# Altium PCB ovencontrol.PcbDoc
Units mil, origin at the board's own origin, x right, y up, seen from the top; angles counter-clockwise.
Board outline 3940 x 3940 mil, 2 copper layers (Top Layer, Bottom Layer); 74 components, 54 nets, 274 pads, 54 vias.
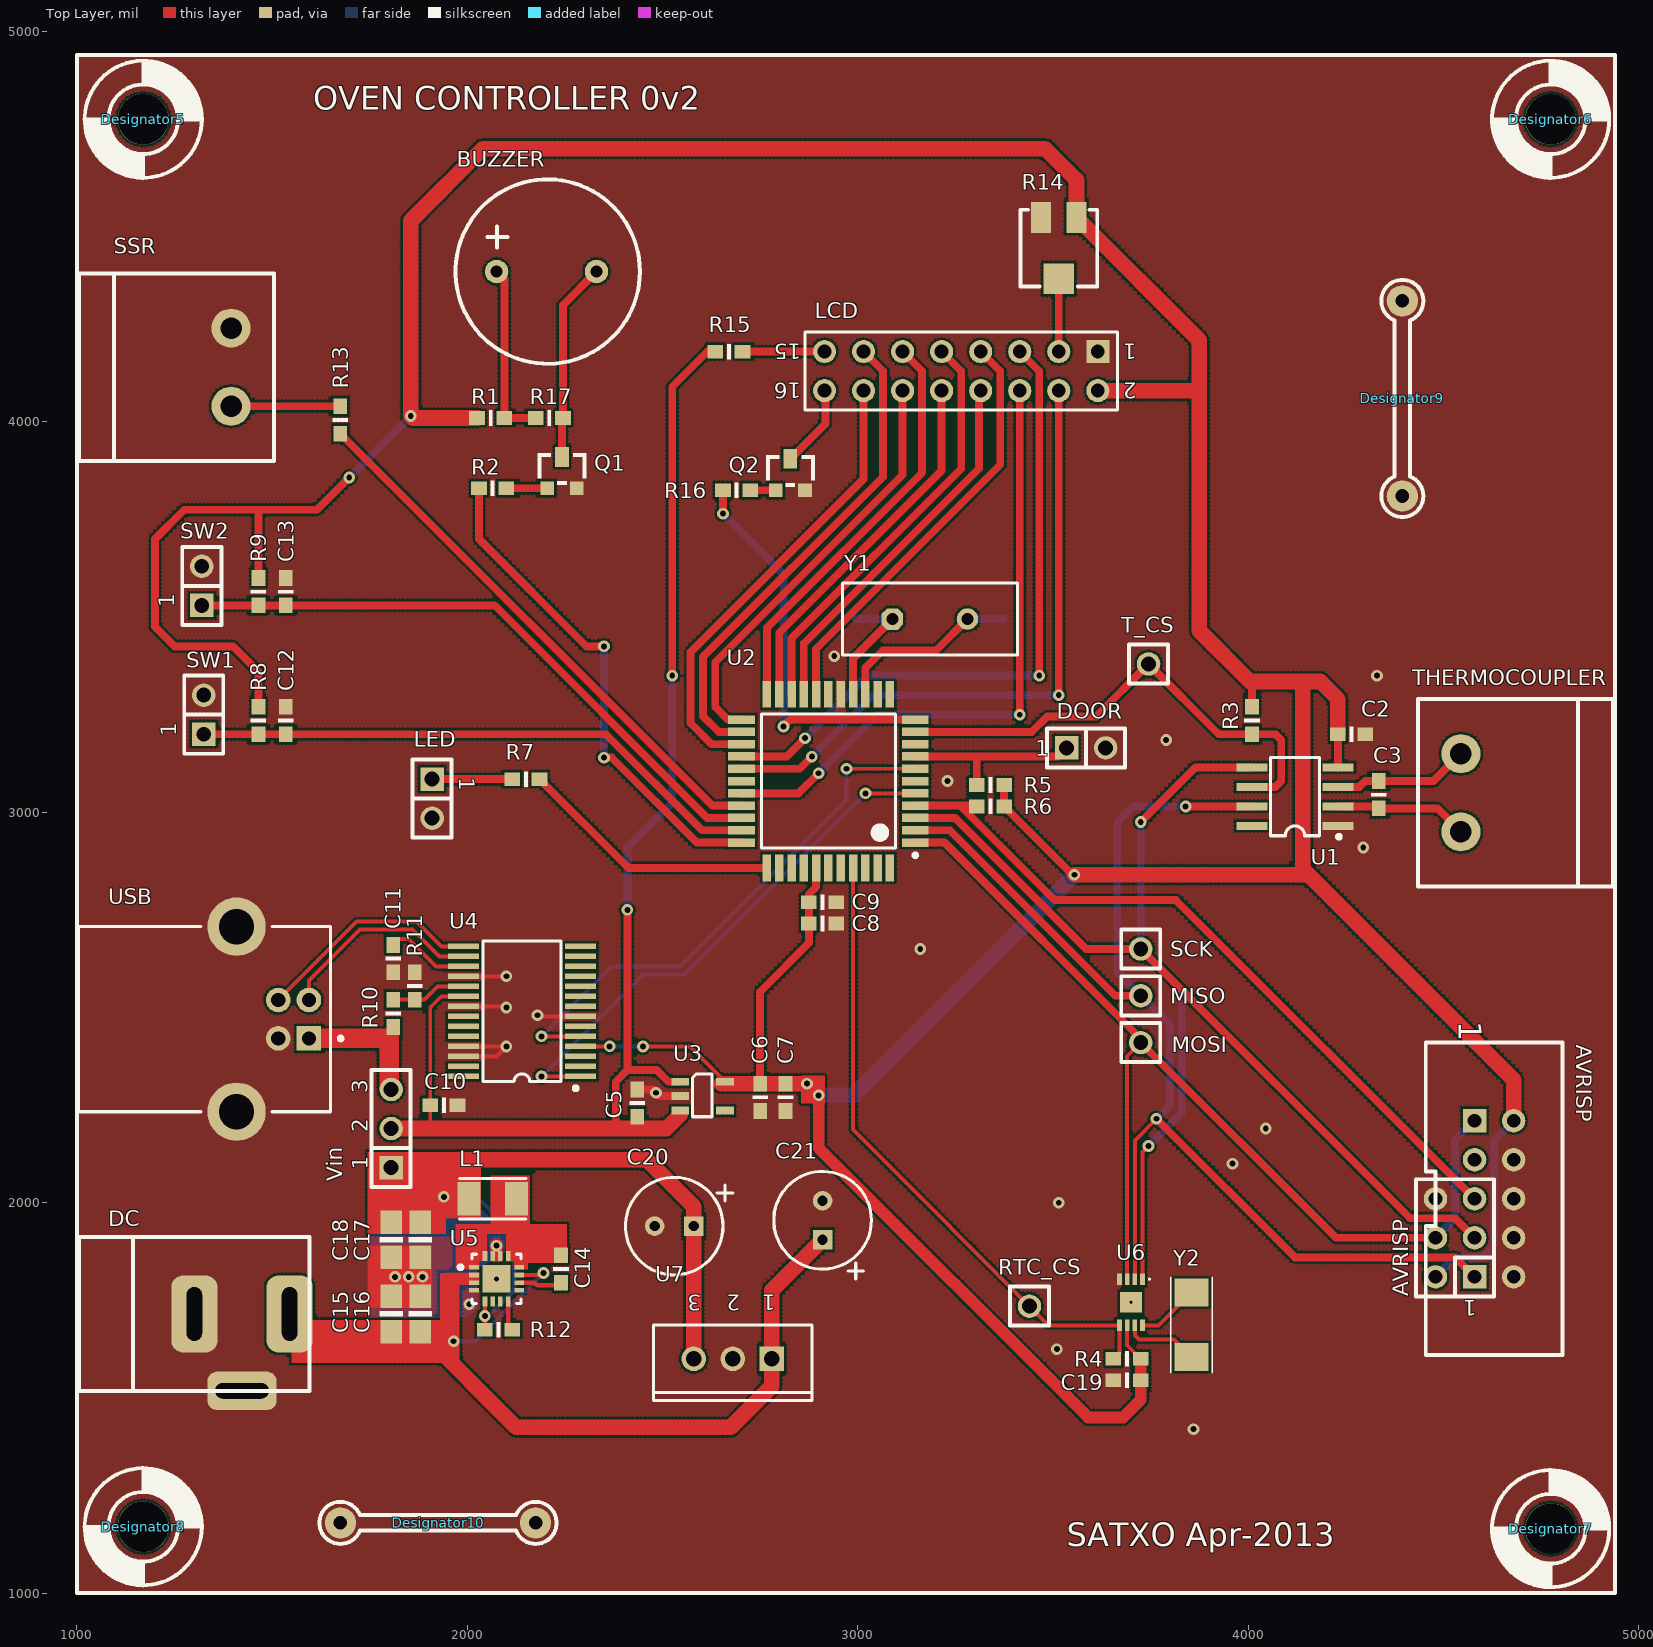
[diagram p0: Top Layer view]
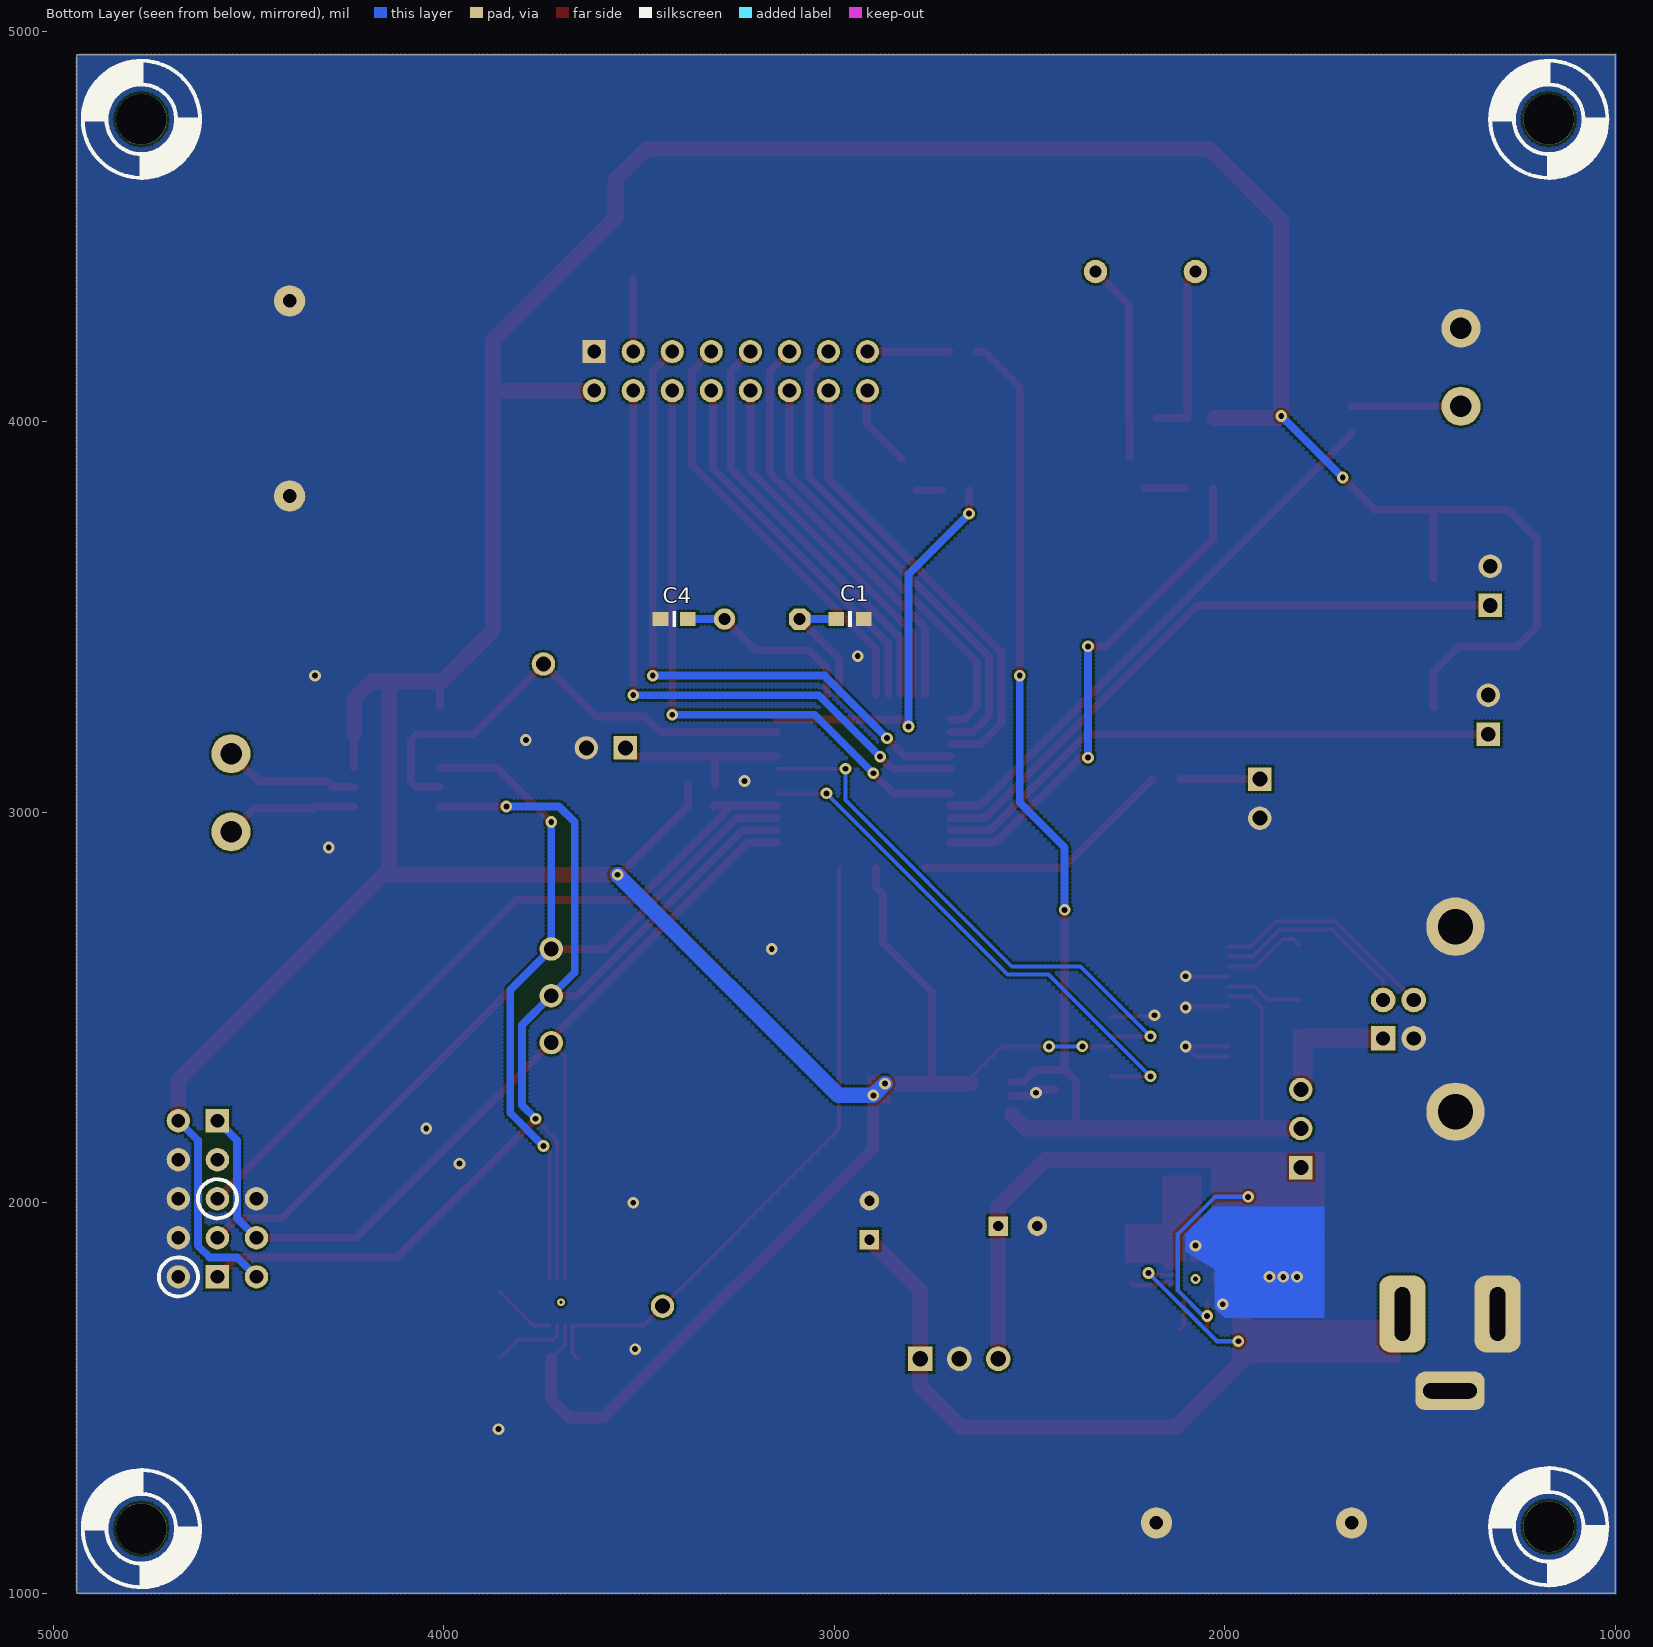
[diagram p1: Bottom Layer view, seen from below]

## Layer stack, top to bottom
Top Layer: signal copper 1.4
Dielectric: dielectric 12.6, FR-4, Dk 4.8
Bottom Layer: signal copper 1.4

## Board outline
1000,1000 4940,1000 4940,4940 1000,4940

## Design rules (kind name [scope] priority, off if disabled: settings)
Clearance Clearance-xPP-xTP-xTT [All] p1: gap=5.91
ComponentClearance [All] p1: gap=9.84 collisioncheckmode=3 verticalgap=9.84 showdistances=FALSE
DiffPairsRouting [All] p1: maxlimit=9.84 minlimit=9.84 mostfreqgap=9.84 maxuncoupledlength=492.13
Height [All] p1: minheight=0 maxheight=984.25 prefheight=492.13
HoleSize HoleSize-PTH [All] p1: absolutevalues=TRUE maxlimit=78.74 minlimit=9.84 maxpercent=80.000 minpercent=20.000
HoleToHoleClearance [All] p1: gap=5.91 allowstackedmicrovias=TRUE
MinimumAnnularRing "Minimum IAR  >0.45mm" [((ObjectKind = 'Pad') OR (ObjectKind = 'Via')) And (Layer = 'MultiLayer') And (HoleDiameter > AsMM(0.45))] p1: minimumring=9.84 // minimum inner annular ring for pads > 0.45mm finished hole size
MinimumAnnularRing "Minimum IAR <=0.45mm" [((ObjectKind = 'Pad') OR (ObjectKind = 'Via')) And (Layer = 'MultiLayer') And (HoleDiameter <= AsMM(0.45))] p2: minimumring=8.86 // minimum inner annular ring for pads <= 0.45mm finished hole size
MinimumSolderMaskSliver [All] p1: minsoldermaskwidth=3.94
PlaneClearance PlaneClearance-IPI [All] p1: clearance=15.75
PlaneConnect [All] p1: planeconnectstyle=Direct reliefexpansion=15.75 reliefentries=4 reliefconductorwidth=7.87 reliefairgap=7.87
PolygonConnect PolygonConnect-xTW [All] p1: connectstyle=Direct reliefconductorwidth=7.87 reliefentries=4 polygonreliefangle="90 Angle"
RoutingCorners [All] p1: cornerstyle=45-Degree minsetback=98.43 maxsetback=98.43
RoutingVias "RoutingVias > 0.45mm" [(ObjectKind = 'Via') And (HoleDiameter > AsMM(0.45))] p1: holewidth=19.68 width=39.37 viastyle="Through Hole" minholewidth=17.72 minwidth=37.4 maxholewidth=35.43 maxwidth=55.12 // finishet hole size > 0.45mm
RoutingVias "RoutingVias <= 0.45mm" [(ObjectKind = 'Via') And (HoleDiameter <= AsMM(0.45))] p2: holewidth=11.81 width=31.5 viastyle="Through Hole" minholewidth=9.84 minwidth=27.56 maxholewidth=19.68 maxwidth=39.37 // finishet hole size <= 0.45mm
SilkToSilkClearance [All] p1: silktosilkclearance=7.87
SilkscreenOverComponentPads [All] p1: minsilkscreentomaskgap=7.87
SolderMaskExpansion [All] p1: expansion=3.94
Width Width-xTW [All] p1: maxlimit=59.06 minlimit=5.91 preferedwidth=7.87
17 further rules are at their usual default settings.

## Classes and differential pairs
component class ovencontrol: AVRISP BUZZER C1 C2 C3 C4 C5 C6 C7 C8 C9 C10 C11 C12 C13 C14 C15 C16 C17 C18 C19 C20 C21 DC DOOR L1 LCD LED MISO MOSI Q1 Q2 R1 R2 R3 R4 R5 R6 R7 R8 R9 R10 R11 R12 R13 R14 R15 R16 R17 RTC_CS SCK SSR SW1 SW2 T_CS THERMOCOUPLER U1 U2 U3 U4 U5 U6 U7 USB Vin Y1 Y2

## Components (designator, comment, footprint, x,y, rotation, side; value= is the part's Value field where it differs from the comment)
AVRISP "ICSP" DIL-6 4580,1810 r180 top (schematic designator JP1)
AVRISP "ICSP" IDC-10 4580,2210 r270 top (schematic designator CON3)
BUZZER "BUZZER" Buzzer_12mm 2075,4385 r0 top (schematic designator BZ1)
C1 "22pF" 0603 2925,3495 r0 bottom
C2 "100nF" 0603 4230,3200 r0 top
C3 "100nF" 0603 4335,3010 r90 top
C4 "22pF" 0603 3445,3495 r180 bottom
C5 "1uF" 0603 2435,2220 r90 top
C6 "1uF" 0603 2750,2305 r270 top
C7 "100nF" 0603 2815,2305 r270 top
C8 "100nF" 0603 2945,2715 r180 top
C9 "1nF" 0603 2945,2770 r180 top
C10 "100nF" 0603 1905,2250 r0 top
C11 "100nF" 0603 1810,2590 r90 top
C12 "100nF" 0603 1535,3200 r90 top
C13 "100nF" 0603 1535,3530 r90 top
C14 "22nF" 0603 2240,1795 r90 top
C15 "10uF" 0805 1805,1670 r90 top
C16 "10uF" 0805 1880,1670 r90 top
C17 "22uF" 0805 1880,1950 r270 top
C18 "22uF" 0805 1805,1950 r270 top
C19 "100nF" 0603 3725,1545 r180 top
C20 "100uF" RADIAL-2.5MM 2580,1940 r180 top
C21 "10uF" RADIAL-2.5MM 2910,1905 r90 top
DC "3P" JACKPOW/PD-2.5MM-TH 1545,1715 r180 top (schematic designator CON4)
Designator5 "Comment" NPTH-3MM 1170,4775 r0 top
Designator6 "Comment" NPTH-3MM 4775,4775 r0 top
Designator7 "Comment" NPTH-3MM 4775,1165 r0 top
Designator8 "Comment" NPTH-3MM 1170,1170 r0 top
Designator9 "Comment" TEST-PROBE2 4395,3810 r90 top
Designator10 "Comment" TEST-PROBE2 2175,1180 r180 top
DOOR "DOOR" SIP-2 3535,3165 r0 top (schematic designator CON9)
L1 "4.7uH" 1210 2065,2010 r180 top
LCD "CON16" HDR2X8 3615,4180 r180 top (schematic designator P1)
LED "LED" SIP-2 1910,3085 r270 top (schematic designator CON6)
MISO "Test Point" TERMINAL 3725,2530 r0 top (schematic designator TP1)
MOSI "Test Point" TERMINAL 3725,2410 r0 top (schematic designator TP2)
Q1 "BC847C" SOT-23@BEC 2205,3830 r0 top
Q2 "BC847C" SOT-23@BEC 2790,3825 r0 top
R1 "100R" 0603 2095,4010 r180 top
R2 "10K" 0603 2100,3830 r180 top
R3 "10K" 0603 4010,3270 r270 top
R4 "10K" 0603 3725,1600 r180 top
R5 "10K" 0603 3375,3070 r180 top
R6 "10K" 0603 3375,3015 r180 top
R7 "470K" 0603 2185,3085 r180 top
R8 "10K" 0603 1465,3270 r270 top
R9 "10K" 0603 1465,3600 r270 top
R10 "4.7K" 0603 1810,2450 r90 top
R11 "10K" 0603 1865,2520 r90 top
R12 "10K" 0603 2115,1675 r180 top
R13 "100R" 0603 1675,3970 r90 top
R14 "10K" POT4MM-2 3515,4445 r270 top
R15 "100R" 0603 2635,4180 r0 top
R16 "10K" 0603 2655,3825 r0 top
R17 "1K" 0603 2245,4010 r180 top
RTC_CS "Test Point" TERMINAL 3440,1735 r0 top (schematic designator TP5)
SCK "Test Point" TERMINAL 3725,2650 r0 top (schematic designator TP3)
SSR "SSR" INTERLOCK2-5MM 1395,4040 r90 top (schematic designator CON5)
SW1 "SW1" SIP-2 1325,3200 r90 top (schematic designator CON7)
SW2 "SW2" SIP-2 1320,3530 r90 top (schematic designator CON8)
T_CS "Test Point" TERMINAL 3745,3380 r0 top (schematic designator TP4)
THERMOCOUPLER "2P" INTERLOCK2-5MM 4545,3150 r270 top (schematic designator CON1)
U1 "MAX31855" SOIC-8 4120,3040 r180 top
U2 "ATmega8515L-8AU" TQFP-44 2925,3080 r180 top
U3 "MCP1824T" SOT-23-5 2545,2310 r0 top
U4 "FT232RL" SSOP-28 2140,2490 r180 top
U5 "MCP16321/2" QFN50P300X300-16V4L 2075,1805 r0 top
U6 "DS1347" TDFN-8 3700,1745 r270 top
U7 "7805" TO-220 2680,1600 r180 top
USB "440119-4" 440119 1555,2470 r180 top (schematic designator J1)
Vin "3P" SIP-3 1805,2090 r90 top (schematic designator JP2)
Y1 "8MHz" HC-49U 3185,3495 r0 top
Y2 "32.768MHz" XTAL-SMD-4.9x1.8 3855,1770 r270 top

## Footprints (in the part's own frame and the unit in brackets; to place one, negate y for a bottom-side part, rotate by r counter-clockwise, add the part's x,y. Pads: shape width x height; smd on the part's side, far side on the other; paste and mask are expansions set on the pad)
0603 [mil]
  rect 40x35 smd: 1(0,0) 2(70,0)
  silkscreen extent 30,-20 40,20
0805 [mil]
  rect 60x55 smd: 1(0,0) 2(90,0)
  silkscreen extent 38,-30 52,30
1210 [mm] "2-pin 1210 outline"
  rect 1.5x2.2 smd: 1(-1.55,0) 2(1.55,0)
  silkscreen extent -2.16,-1.32 2.16,1.32
440119 [mm] "Connector; USB1.1, Type B, Thru-Hole; 4 Position; Right Angle"
  rect 1.6x1.6 hole 0.92: 1(-1,1.25)
  round 1.6 hole 0.92: 2(-1,-1.25) 3(1,-1.25) 4(1,1.25)
  round 3.8 hole 2.3: 5(3.71,6.02) 6(3.71,-6.02)
  silkscreen extent -3.18,-6.02 13.99,6.02
Buzzer_12mm [mil] "12mm dia; holes 6.5mm"
  round 60 hole 30: +(0,0) -(255.91,0)
  silkscreen extent -105,-236 367,236
DIL-6 [mil] "Dual inline 2x3 pins 2.54mm pitch"
  rect 60x60 hole 35: 1(0,0)
  round 60 hole 35: 2(100,0) 3(0,-100) 4(100,-100) 5(0,-200) 6(100,-200)
  silkscreen extent -50,-250 150,50
HC-49U [mm] "Quartz Crystal, Thru-Hole; 2 Leads; Body 11.35 x 4.65 x 13.46 mm (LxWxH max)"
  oct 1.4x1.4 hole 0.8: 1(-2.44,0)
  round 1.4 hole 0.8: 2(2.44,0)
  silkscreen extent -5.7,-2.35 5.7,2.35
HDR2X8 [mm] "Connector; Header; 8x2 Position"
  rect 1.5x1.5 hole 0.9: 1(0,0)
  round 1.5 hole 0.9: 2(0,2.54) 3(2.54,0) 4(2.54,2.54) 5(5.08,0) 6(5.08,2.54) 7(7.62,0) 8(7.62,2.54) 9(10.16,0) 10(10.16,2.54) 11(12.7,0) 12(12.7,2.54) 13(15.24,0) 14(15.24,2.54) 15(17.78,0) 16(17.78,2.54)
  silkscreen extent -1.27,-1.27 19.05,3.81
IDC-10 [mil]
  rect 60x60 hole 35: 1(0,0)
  round 60 hole 35: 2(0,100) 3(100,0) 4(100,100) 5(200,0) 6(200,100) 7(300,0) 8(300,100) 9(400,0) 10(400,100)
  silkscreen extent -200,-125 600,225
INTERLOCK2-5MM [mil]
  round 100 hole 55: 1(0,0) 2(200,0)
  silkscreen extent -140,-110 340,390
JACKPOW/PD-2.5MM-TH [mm] "Jack Power 2.5mm with insertion detect - Through Hole"
  rrect50% 3x5 hole 1 slot 3.5 at 90 deg: 1(0,0) 2(6.2,0)
  rrect50% 4.5x2.5 hole 1 slot 3.5 at 0 deg: 3(3.1,5)
  silkscreen extent -1.3,-5 13.7,5
NPTH-3MM [mil]
  round 130 hole 130 unplated: 1(0,0)
  silkscreen extent -150,-150 150,150
POT4MM-2 [mm] "Square Trimming Potentiometer"
  rect 2x1.3 smd: CCW(-2,-1.15) CW(-2,1.15)
  rect 2x2 smd: W(2,0)
  silkscreen extent -2.5,-2.5 2.5,2.5
QFN50P300X300-16V4L [mm] "QFN, 16-Leads, Body 3x3mm, Pitch 0.5mm, IPC High Density"
  rect 0.65x0.3 smd: 1(-1.475,0.75) 2(-1.475,0.25) 3(-1.475,-0.25) 4(-1.475,-0.75) 9(1.475,-0.75) 10(1.475,-0.25) 11(1.475,0.25) 12(1.475,0.75)
  rect 0.3x0.65 smd: 5(-0.75,-1.475) 6(-0.25,-1.475) 7(0.25,-1.475) 8(0.75,-1.475) 13(0.75,1.475) 14(0.25,1.475) 15(-0.25,1.475) 16(-0.75,1.475)
  rect 1.8x1.8 smd: 17(0,0)
  silkscreen extent -2.47,-1.6 1.6,1.6, body extent -1.58,-1.58 1.58,1.58, height 1
RADIAL-2.5MM [mil]
  rect 50x50 hole 26: 1(0,0)
  round 50 hole 26: 2(100,0)
  silkscreen extent -100,-125 175,125
SIP-2 [mil]
  rect 60x60 hole 38: 1(0,0)
  round 60 hole 38: 2(100,0)
  silkscreen extent -50,-50 150,50
SIP-3 [mil]
  rect 60x60 hole 38: 1(0,0)
  round 60 hole 38: 2(100,0) 3(200,0)
  silkscreen extent -50,-50 250,50
SOIC-8 [mil] "Small Outline 8 leads Body Size 150mils"
  rect 80x20 smd: 1(-110,75) 2(-110,25) 3(-110,-25) 4(-110,-75) 5(110,-75) 6(110,-25) 7(110,25) 8(110,75)
  silkscreen extent -117,-100 63,107
SOT-23-5 [mil]
  rect 45x20 smd: 1(0,0) 2(0,-37) 3(0,-74) 4(115,-74) 5(115,0)
  silkscreen extent 32,-90 82,20
SOT-23@BEC [mil] "Bipolar Transistor SOT23"
  rect 35x35 smd: B(0,0) E(75,0)
  rect 35x50 smd: C(37.5,80)
  silkscreen extent -25,8 100,90
SSOP-28 [mil]
  rect 80x13.78 smd: 1(-150,166.4) 2(-150,140.8) 3(-150,115.2) 4(-150,89.6) 5(-150,64) 6(-150,38.4) 7(-150,12.8) 8(-150,-12.8) 9(-150,-38.4) 10(-150,-64) 11(-150,-89.6) 12(-150,-115.2) 13(-150,-140.8) 14(-150,-166.4) 15(150,-166.4) 16(150,-140.8) 17(150,-115.2) 18(150,-89.6) 19(150,-64) 20(150,-38.4) 21(150,-12.8) 22(150,12.8) 23(150,38.4) 24(150,64) 25(150,89.6) 26(150,115.2) 27(150,140.8) 28(150,166.4)
  silkscreen extent -143,-180 100,202
TDFN-8 [mm] "SON, 8-Leads, Body 2x3mm, Pitch 0.5mm, Microchip Recommended"
  rect 0.75x0.3 smd: 1(-1.5,0.75) 2(-1.5,0.25) 3(-1.5,-0.25) 4(-1.5,-0.75) 5(1.5,-0.75) 6(1.5,-0.25) 7(1.5,0.25) 8(1.5,0.75)
  rect 1.36x1.46 smd: 9(0,0)
  silkscreen extent -1.55,1.15 -1.45,1.25, body extent -1.52,-1.02 1.52,1.02, height 0.8
TERMINAL [mil]
  round 60 hole 37.99: 1(0,0)
  silkscreen extent -50,-50 50,50
TEST-PROBE2 [mil]
  round 80 hole 35: 1(0,0) 1(500,0)
  silkscreen extent -54,-54 554,54
TO-220 [mm] "TO, Thru-Hole, Vertical, Heatsink Mounted; 3 In-Line Leads; Pitch 2.54 mm"
  rect 1.6x1.6 hole 1: 1(-2.54,0)
  round 1.6 hole 1: 2(0,0) 3(2.54,0)
  silkscreen extent -5.15,-2.2 5.15,2.7
TQFP-44 [mm] "Thin QFP, 44-Leads, Body 10x10mm, Pitch 0.8mm, IPC Medium Density"
  rect 1.75x0.55 smd: 1(-5.65,4) 2(-5.65,3.2) 3(-5.65,2.4) 4(-5.65,1.6) 5(-5.65,0.8) 6(-5.65,0) 7(-5.65,-0.8) 8(-5.65,-1.6) 9(-5.65,-2.4) 10(-5.65,-3.2) 11(-5.65,-4) 23(5.65,-4) 24(5.65,-3.2) 25(5.65,-2.4) 26(5.65,-1.6) 27(5.65,-0.8) 28(5.65,0) 29(5.65,0.8) 30(5.65,1.6) 31(5.65,2.4) 32(5.65,3.2) 33(5.65,4)
  rect 0.55x1.75 smd: 12(-4,-5.65) 13(-3.2,-5.65) 14(-2.4,-5.65) 15(-1.6,-5.65) 16(-0.8,-5.65) 17(0,-5.65) 18(0.8,-5.65) 19(1.6,-5.65) 20(2.4,-5.65) 21(3.2,-5.65) 22(4,-5.65) 34(4,5.65) 35(3.2,5.65) 36(2.4,5.65) 37(1.6,5.65) 38(0.8,5.65) 39(0,5.65) 40(-0.8,5.65) 41(-1.6,5.65) 42(-2.4,5.65) 43(-3.2,5.65) 44(-4,5.65)
  silkscreen extent -5.77,-4.35 4.35,4.95, body extent -5,-5 5,5, height 1.2
XTAL-SMD-4.9x1.8 [mm]
  rect 1.8x2.2 smd: 1(0,0) 2(4.2,0)
  silkscreen extent -0.99,-1.35 5.21,1.35

## Part data
AVRISP: library part JMP6, "6-Pin Jumper"
AVRISP: library part CON10, "Connector 10 Pins"
BUZZER: library part Buzzer, "Transductor"
C1 C2 C3 C4 C5 C6 C7 C8 C9 C10 C11 C12 C13 C14 C15 C16 C17 C18 C19: library part CAP, "Capacitor"
C20 C21: library part "CAP POL", "Polarized Capacitor"
DC: library part "JACK POWER PD", "Jack Power with insertion detect"
DOOR LED SSR SW1 SW2 THERMOCOUPLER: library part CON02, "Connector 2 pins"
L1: library part IND, "Inductor"
LCD: "Header, 16-Pin"
MISO MOSI RTC_CS SCK T_CS: library part TEST-PROBE, "Test/Probe Point"
Q1 Q2: library part NPN, "NPN General Purpose Transistor"
R1 R2 R3 R4 R5 R6 R7 R8 R9 R10 R11 R12 R13 R15 R16 R17: library part RES, "Resistor"
R14: library part "RES Pot", "Square Trimming Potentiometer"
U1: "Cold-Junction Compensated Thermocouple-to-Digital Converter"
U2: "8-bit AVR Microcontroller, 8KB Flash, 512 Bytes EEPROM, 512 Bytes SRAM, 2.7-5.5V, 44-pin TQFP, Industrial Grade (-40°C to 85°C)"
U3: "300 mA, Low Voltage, Low Quiescent Current LDO Regulator, 5-Pin SOT-23, Extended Temperature, Tape and Reel"
U4: "USB UART Asynchronous Serial Data Transfer Chip, SSOP-28, Tube"
U5: "24V Input, 1A/2A Output, High Efficiency Synchronous Buck Regulator  with Power Good Indicatio"
U6: "Low-Current, SPI-Compatible Real-Time Clock"
U7: library part "78xx regulator", "3-Terminal Medium-Current Positive Fixed Voltage Regulator"
USB: "USB 1.1, Right Angle, Thru-Hole, B Type, Receptacle, 4 Position, Black"
Vin: library part JMP3, "3-Jumper"
Y1 Y2: library part "Crystal Oscillator", "Crystal Oscillator"

## Via types
v1: diameter 30, hole 15, Top Layer to Bottom Layer, 52 vias
v2: diameter 25.98, hole 12.99, Top Layer to Bottom Layer, tented top, 1 vias
v3: diameter 19.68, hole 7.87, Top Layer to Bottom Layer, tented top, 1 vias

## Nets (pads, with @x,y where several pads share a name; then routed paths per layer and width w, separated by ;. In a path a pad name is that pad's centre, name@x,y a point inside that pad or via, vN(x,y) a via of type N, cw(c..) or ccw(c..) an arc to the next point about the centre after c; other vN are vias at no path point)
3V3: AVRISP.2 C2.1 C6.1 C7.1 C8.2 C9.2 C19.1 LCD.2 R1.2 R3.1 R4.1 R5.1 R6.1 R8.1 R9.1 R14.CW U1.4 U2.38 U3.5 U4.4 U6.6 | length 12688.7
  Top Layer w10: U4.4 v1(2364.6,2400.4) ; v1(2450,2400) 2570,2400 U3.5 ; U6.6 3690.16,1634.84 R4.1
  Top Layer w20: R8.1 1465,3360 1400,3425 1250,3425 1200,3475 1200,3700 1275,3775 1465,3775 ; R9.1 1465,3775 ; v1(1697.5,3857.5) 1615,3775 1465,3775 ; C6.1 2750,2540 2875,2665 C8.2 C9.2 2875,2790 2893.5,2808.5 U2.38 ; R5.1 R6.1 3550,2840 v1(3555,2840) ; 4005,3335 4010,3330 R3.1 ; U1.4 C2.1
  Top Layer w30: v1(2900,2275) 2900,2140 3590,1450 3680,1450 3725,1495 ; 3725,1500 C19.1 R4.1
  Top Layer w40: R1.2 1860,4010 v1(1855,4015) 1855,4515 2040,4700 3480,4700 3560.28,4619.72 R14.CW 3875,4209.02 3875,4080 ; U3.5@2650,2305 C6.1 C7.1 v1(2870,2305) ; v1(3555,2840) 4145,2840 ; LCD.2 3875,4080 ; C2.1 4230,3290 4185,3335 4140,3335 ; AVRISP.2@4680,2210 4680,2315 4140,2855 4140,3335 ; 3875,4080 3875,3465 4005,3335 4140,3335
  Bottom Layer w10: v1(2364.6,2400.4) 2365,2400 v1(2450,2400)
  Bottom Layer w20: v1(1697.5,3857.5) v1@1850,4010 ; AVRISP.2@4480,1810 4530,1860 4600,1860 4630,1890 4630,2160 AVRISP.2@4680,2210
  Bottom Layer w40: v1(2870,2305) v1(2900,2275) 2990,2275 v1(3555,2840)
5V: C5.1 C10.1 R15.1 U3.1 U3.3 U4.20 Vin.2 | length 3416
  Top Layer w10: 1905,2190 1905,2500 1933.4,2528.4 U4.20
  Top Layer w20: 2380,2190 2380,2310 2410,2340 ; v1(2410,2750) 2410,2340 ; v1(2525,3350) 2525,4090 2615,4180 R15.1 ; U3.1 2515,2310 2485,2340 2410,2340
  Top Layer w40: Vin.2 2380,2190 2510,2190 2545,2225
  Bottom Layer w20: v1(2410,2750) 2410,2910 2525,3025 v1(2525,3350)
BL_PWM: R16.1 U2.11 | length 1013.9
  Top Layer w20: v1(2655,3765) R16.1 ; v1(2810,3220) 2827.48,3237.48 U2.11
  Bottom Layer w20: v1(2655,3765) 2810,3610 v1(2810,3220)
BUZZER: R2.2 U2.33 | length 1291.6
  Top Layer w20: R2.2 2030,3700 2305,3425 v1(2350,3425) ; v1(2350,3140) 2370,3140 2587.48,2922.52 U2.33
  Bottom Layer w20: v1(2350,3140) v1(2350,3425)
DOOR: DOOR.1 R5.2 U2.8 | length 469.7
  Top Layer w20: U2.8 3310,3142.99 3512.99,3142.99 DOOR.1 ; R5.2 3305,3142.99
GND: AVRISP.4@4680,2110 AVRISP.6 AVRISP.8 AVRISP.10 C1.1 C2.2 C4.1 C5.2 C6.2 C7.2 C8.1 C9.1 C10.2 C11.1 C12.2 C13.2 C15.2 C16.2 C17.2 C18.2 C19.2 C20.2 C21.2 DC.2 DC.3 Designator9.1 Designator10.1 DOOR.2 LCD.1 LED.2 Q1.E Q2.E R11.2 R14.CCW SSR.2 SW1.2 SW2.2 U1.1 U2.16 U3.2 U4.7 U4.18 U4.21 U4.25 U4.26 U5.4 U5.14 U5.15 U6.4 U7.2 USB.4 USB.5 USB.6 | length 677.5
  Top Layer w10: U4.26 2074.8,2374.8 v1(2100,2400) ; U4.25 v1@2100,2400.4 ; U4.21 v1@2100,2502.8 ; U4.18 v1@2100,2579.6 ; v1@2180,2477.2 U4.7
  Top Layer w20: C5.2 2475,2290 2492,2273 U3.2
  other v1: 3860,1420 3510,1625 2005,1740 1815,1810 1850,1810 1885,1810 2075,1890 3515,2000 3960,2100 4045,2190 2483.5,2281.5 2180,2480 2100,2500 2100,2580 3160,2650 4295,2910 3230,3080 3790,3185 4330,3350 2940,3400
LCD_BL+: LCD.15 R15.2 | length 210
  Top Layer w20: R15.2 LCD.15
LCD_BL-: LCD.16 Q2.C | length 213.3
  Top Layer w20: Q2.C 2917.5,3995 2917.5,4077.5 LCD.16
LCD_D0: LCD.7 U2.18 | length 1093.6
  Top Layer w20: U2.18 2893.5,3418.5 3365,3890 3365,4130 LCD.7
LCD_D1: LCD.8 U2.19 | length 963.5
  Top Layer w20: U2.19 2862.01,3432.01 3040,3610 ; 3040.03,3610 3310.98,3880.96 LCD.8@3310.98,4080
LCD_D2: LCD.9 U2.20 | length 1078.2
  Top Layer w20: U2.20 2830.51,3445.51 3265,3880 3265,4130 LCD.9
LCD_D3: LCD.10 U2.21 | length 949.9
  Top Layer w20: U2.21 2799.02,3459.47 3215,3875.46 LCD.10
LCD_D4: LCD.11 U2.22 | length 1062.9
  Top Layer w20: U2.22 2767.52,3472.52 3165,3870 3165,4015 3165,4130 LCD.11
LCD_D5: LCD.12 U2.23 | length 1089.9
  Top Layer w20: U2.23 2667.52,3237.48 2635,3270 2635,3384.54 3115,3864.54 LCD.12
LCD_D6: LCD.13 U2.24 | length 1261.2
  Top Layer w20: U2.24 2644.02,3205.98 2603.5,3246.5 2603.5,3397.59 3065,3859.08 3065,4130 LCD.13
LCD_D7: LCD.14 U2.25 | length 1188.2
  Top Layer w20: U2.25 2625.51,3174.49 2572.01,3227.99 2572.01,3410.63 3015,3853.63 LCD.14
LCD_EN: LCD.6 U2.29 | length 1625.9
  Top Layer w20: U2.29 2848.5,3048.5 v1(2900,3100) ; v1(3415,3250) LCD.6
  Bottom Layer w20: v1(2900,3100) 3050,3250 v1(3415,3250)
LCD_RS: LCD.4 U2.27 | length 1670.5
  Top Layer w20: U2.27 2851.5,3111.5 v1(2882.5,3142.5) ; v1(3515,3300) LCD.4
  Bottom Layer w20: v1(2882.5,3142.5) 3040,3300 v1(3515,3300)
LCD_RW: LCD.5 U2.26 | length 1698.9
  Top Layer w20: U2.26 2817.99,3142.99 v1(2865,3190) ; LCD.5 3465,4130 v1(3465,3350)
  Bottom Layer w20: v1(2865,3190) 3025,3350 v1(3465,3350)
LCD_VO: LCD.3 R14.W | length 186.3
  Top Layer w20: LCD.3 R14.W
LED_GREEN: R7.1 U2.34 | length 676.7
  Top Layer w20: R7.1 2412.44,2857.56 U2.34
MISO: AVRISP.1@4580,1810 AVRISP.9 MISO.1 U1.7 U2.2 U6.2 | length 3361.7
  Top Layer w10: U6.2 3709.84,2159.84 v1(3765,2215)
  Top Layer w20: U2.2 3235.98,2954.02 3660,2530 MISO.1 ; v1(3765,2215) 4120,1860 4530,1860 AVRISP.9 ; v1(3840,3015) U1.7
  Bottom Layer w20: v1(3765,2215) 3800,2250 3800,2455 MISO.1 3665,2590 3665,2975 3705,3015 v1(3840,3015)
MOSI: AVRISP.1@4580,2210 AVRISP.4@4480,1910 MOSI.1 U2.1 U6.3 | length 2716.7
  Top Layer w10: U6.3 3690.16,2375.16 MOSI.1
  Top Layer w20: U2.1 3222.48,2922.52 MOSI.1@3730,2415 ; MOSI.1 4225,1910 AVRISP.4@4480,1910
  Bottom Layer w20: AVRISP.4@4480,1910 4530,1960 4530,2160 AVRISP.1@4580,2210
NetBUZZER_+: BUZZER.+ R1.1 R17.2 | length 463.3
  Top Layer w20: BUZZER.+ 2095,4365 R1.1 R17.2
NetBUZZER_-: BUZZER.- Q1.C R17.1 | length 511.6
  Top Layer w20: Q1.C 2242.5,4007.5 R17.1 2245,4299.09 BUZZER.-
NetC11_2: C11.2 U4.17 | length 215.1
  Top Layer w10: C11.2 1825,2675 1850,2675 1919.8,2605.2 U4.17
NetC14_1: C14.1 U5.10 | length 112.4
  Top Layer w11: U5.10 2133.23,1795 2172.34,1795 2178.91,1788.44 2233.44,1788.44 C14.1
NetC14_2: C14.2 L1.1 U5.1 U5.12 U5.13 U5.16
NetLED_1: LED.1 R7.2 | length 205
  Top Layer w20: LED.1 R7.2
NetQ1_B: Q1.B R2.1 | length 105
  Top Layer w20: R2.1 Q1.B
NetQ2_B: Q2.B R16.2 | length 65
  Top Layer w20: R16.2 Q2.B
NetR10_2: R10.2 R11.1 U4.19 | length 194.1
  Top Layer w10: R10.2 R11.1 1890,2520 1924,2554 U4.19
NetR12_1: R12.1 U5.8 | length 76.3
  Top Layer w11: U5.8 2104.53,1685.47 R12.1
NetR13_2: R13.2 SSR.1 | length 280
  Top Layer w20: SSR.1 R13.2
NetU4_15: U4.15 USB.3 | length 583.9
  Top Layer w10: USB.3 1716.42,2720 1870,2720 1933.6,2656.4 U4.15
NetU4_16: U4.16 USB.2 | length 528.6
  Top Layer w10: USB.2 1594.37,2569.37 1725,2700 1860,2700 1929.2,2630.8 U4.16
NetU6_7: U6.7 Y2.2 | length 193.9
  Top Layer w10: U6.7 3709.84,1660.16 3720,1650 3809.65,1650 Y2.2
NetU6_8: U6.8 Y2.1 | length 160.3
  Top Layer w10: U6.8 3770.94,1685.94 Y2.1
RSTN: AVRISP.5 R6.2 U2.4 | length 1897.5
  Top Layer w20: U2.4 3262.99,3017.01 ; R6.2@3310,3015 3307.99,3017.01 3262.99,3017.01 ; AVRISP.5@4580,2010 3815,2775 3505,2775 3262.99,3017.01
RTC_CS: R4.2 RTC_CS.1 U2.41 U6.5 | length 1652.9
  Top Layer w10: U2.41 2987.99,2187.01 3489.06,1685.94 U6.5 3670.47,1615.47 R4.2
SCK: AVRISP.3@4580,1910 AVRISP.7 SCK.1 U1.5 U2.3 U6.1 | length 3477.1
  Top Layer w10: U6.1 3729.53,2129.53 v1(3745,2145)
  Top Layer w20: U2.3 3249.49,2985.51 3585,2650 SCK.1 4415,1960 4530,1960 AVRISP.7 ; v1(3725,2975) 3865,3115 U1.5
  Bottom Layer w20: v1(3725,2975) SCK.1 3830,2545 3830,2230 v1(3745,2145)
SSR: R13.1 U2.30 | length 1422.3
  Top Layer w20: R13.1 2627.99,3017.01 U2.30
SW1: C12.1 R8.2 SW1.1 U2.32 | length 1479.4
  Top Layer w20: SW1.1 2355,3200 2600.98,2954.02 U2.32
SW2: C13.1 R9.2 SW2.1 U2.31 | length 1608.1
  Top Layer w20: SW2.1 R9.2 C13.1 2070,3530 2614.49,2985.51 U2.31
T_CS: R3.2 T_CS.1 U1.6 U2.10 | length 1276.6
  Top Layer w20: U2.10 3445.98,3205.98 3485,3245 3610,3245 T_CS.1 3925,3200 4070,3200 4085,3185 4085,3080 4070,3065 U1.6
T_NEG: C3.1 THERMOCOUPLER.2 U1.2 | length 341.9
  Top Layer w20: U1.2 4330,3015 C3.1 4485,3010 THERMOCOUPLER.2
T_POS: C3.2 THERMOCOUPLER.1 U1.3 | length 350.2
  Top Layer w20: U1.3 4285,3065 4300,3080 C3.2 4475,3080 THERMOCOUPLER.1
URX: U2.5 U4.1 | length 1357.7
  Top Layer w10: v1(2190,2323.6) U4.1 ; v1(3020,3048.5) U2.5
  Bottom Layer w10: v1(2190,2323.6) 2451.4,2585 2556.5,2585 v1(3020,3048.5)
UTX: U2.7 U4.5 | length 1388.2
  Top Layer w10: v1(2190,2426) U4.5 ; v1(2971.5,3111.5) U2.7
  Bottom Layer w10: v1(2190,2426) 2369.5,2605.5 2545.5,2605.5 2971.5,3031.5 v1(2971.5,3111.5)
VDC: C15.1 C16.1 C21.1 DC.1 U5.2 U5.3 U5.11 U7.1 | length 2189
  Top Layer w11: U5.11 2189.84,1814.84 v1(2195,1820)
  Top Layer w40: DC.1 1590,1670 C15.1 C16.1 2125,1425 2675,1425 2780,1530 U7.1 2780,1775 C21.1
  Bottom Layer w11: v1@1970,1645 2020,1645 v1(2195,1820)
  other v1: 1965,1645
VLDO: C17.1 C18.1 C20.1 L1.2 R12.2 U5.5 U7.3 Vin.1 | length 1307.4
  Top Layer w11: R12.2@2045.47,1675.47 U5.5
  Top Layer w40: 2250,2110 2460,2110 2580,1990 U7.3
  Bottom Layer w11: v1(1940,2015) 2025,2015 2120,1920 2120,1775 2055,1710 v1(2045,1710)
VUSB: R10.1 USB.1 Vin.3 | length 331
  Top Layer w50: USB.1 1799.21,2420.79 1800,2420 Vin.3@1800,2295
XTAL1: C1.2 U2.15 Y1.1 | length 328.3
  Top Layer w20: U2.15 2987.99,3394.06 Y1.1
  Bottom Layer w20: C1.2 Y1.1
XTAL2: C4.2 U2.14 Y1.2 | length 474.5
  Top Layer w20: U2.14 3019.49,3369.49 3065,3415 3201.06,3415 Y1.2
  Bottom Layer w20: Y1.2 C4.2
pads on no net: AVRISP.3@4580,2110 Designator5.1 Designator6.1 Designator7.1 Designator8.1 U1.8 U2.6 U2.9 U2.12 U2.13 U2.17 U2.28 U2.35 U2.36 U2.37 U2.39 U2.40 U2.42 U2.43 U2.44 U3.4 U4.2 U4.3 U4.6 U4.8 U4.9 U4.10 U4.11 U4.12 U4.13 U4.14 U4.22 U4.23 U4.24 U4.27 U4.28 U5.6 U5.7 U5.9 U5.17 U6.9
copper on no net:
  other v2: 2075,1805
  other v3: 3700,1745

## Polygon pours and split planes (outlines as drawn)
GND on Top Layer "Top Layer-No Net" (hatched 90Degree grid 10 track 10, remove dead copper, pour order 3): 1000,4940 1000,1000 4940,1000 4940,4940
GND on Bottom Layer "Top Layer-No Net" (hatched 90Degree grid 10 track 10, remove dead copper, pour order 4): 1000,4940 1000,1000 4940,1000 4940,4940

## Other copper
Top Layer:
  rectangle net VDC: 1550,1590 1980,1700
  rectangle net VUSB: 1790,2290 1825,2445
  rectangle net VLDO: 2035,2090 2260,2130
  rectangle net NetC14_2: 2145,1845 2255,1945
  rectangle net GND: 1745,1730 1910,1890
  rectangle net VLDO: 1745,1920 1945,1960
  rectangle net VLDO: 1745,1960 2035,2130
  rectangle net VDC: 1780,1640 1945,1700
  rectangle net VDC: 1930,1640 1980,1820
  rectangle net NetC14_2: 2060,1945 2160,2070
  region net 3V3: 2855,2325 2915,2325 2915,2255 2855,2255
  region net VDC: 2030,1820 1945,1820 1945,1790 2030,1790
  region net GND: 2060,1850 2090,1850 2090,1890 2060,1890
  region net NetC14_2: 2030,1830 2030,1850 2050,1850 2050,1920 2100,1920 2100,1850 2120,1850 2120,1830 2155,1830 2155,1945 1970,1945 1970,1830
Bottom Layer:
  region net GND: 2100,1920 2100,1874 2025,1829 2025,1730 2000,1705 1745,1705 1745,1990 2030,1990

## Silkscreen, mask and mechanical layers (free items; w line width, h text height)
Top Overlay:
  the board outline again, w10
  text "OVEN CONTROLLER 0v2" at 1605,4800 h60
  text "SATXO Apr-2013" at 3535,1120 h60

## Text inside footprints (layer, text, board x,y; h text height)
AVRISP: Top Overlay "1" at 4540,2465 h59.06 r270
AVRISP: Top Overlay "1" at 4585,1750 h40 r180
DOOR: Top Overlay "1" at 3455,3145 h40
LCD: Top Overlay "16" at 2855,4100 h40 r180; Top Overlay "15" at 2855,4200 h40 r180; Top Overlay "1" at 3715,4200 h40 r180; Top Overlay "2" at 3715,4100 h40 r180
LED: Top Overlay "1" at 1980,3090 h40 r270
SW1: Top Overlay "1" at 1255,3195 h40 r90
SW2: Top Overlay "1" at 1250,3525 h40 r90
U7: Top Overlay "1" at 2789.84,1764.37 h40 r180; Top Overlay "2" at 2699.68,1764.37 h40 r180; Top Overlay "3" at 2599.68,1764.37 h40 r180
Vin: Top Overlay "2" at 1745,2180 h40 r90; Top Overlay "1" at 1745,2085 h40 r90; Top Overlay "3" at 1745,2280 h40 r90